# EAGLE board HIDaspx_mini2 (EAGLE 7.4.0)
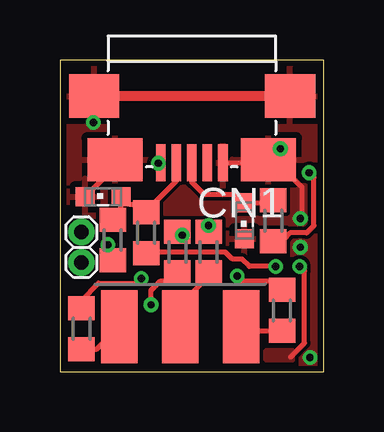
[diagram p0: board, top side]
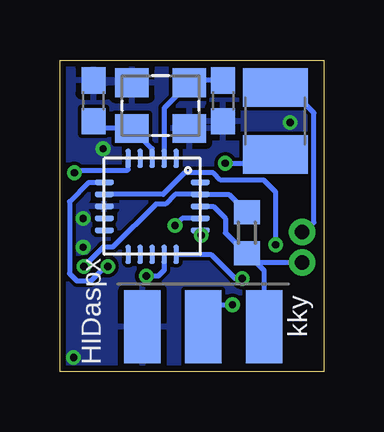
[diagram p1: board, bottom side, seen from below]

Size 11 x 12.99 mm. Coordinates in mm from the lower left corner, seen from the top.
Outline: 0,12.99 0,0 11,0 11,12.99 0,12.99
Copper layers (1*16): Top 0.035mm / dielectric 1.5mm / Bottom 0.035mm
Design rules "Elecrow_2-layer_eagle_rule": minimum track width 6mil, minimum drill 12mil, track to track 6mil, track to pad 6mil, pad to pad 6mil, via to via 6mil, smd to smd 0mil, copper to edge 10mil, drill to drill 10mil, minimum pad ring 10mil, minimum via ring 6mil, stop-mask expansion 2mil, vias tented up to drill 100mil, thermal gap 10mil

## Footprints (pad centres in the part's own frame; a part is rotated, then mirrored left to right if it is on the bottom)
C0603 = smd 1.1 x 1: 1 -0.85,0; 2 0.85,0
MICRO-B = smd 0.4 x 1.55: 1 1.3,2.775; 2 0.65,2.775; 3 0,2.775; 4 -0.65,2.775; 5 -1.3,2.775 | smd 2.3 x 1.8: CASE@1 -3.2,2.65; CASE@2 3.2,2.65 | smd 2.1 x 1.8: CASE@3 -4.1,0; CASE@4 4.075,0
1X02/HALF = drill 0.6 pad 1.016: 1 -0.635,0; 2 0.635,0
SML0603 = smd 0.8 x 0.8: A 0.75,0; C -0.75,0
C3225 = smd 1.6 x 2.7: 1 -1.4,0; 2 1.4,0
R0603 = smd 1 x 1.1: 1 -0.85,0; 2 0.85,0
MLF20 = smd 0.8 x 0.23: P$1 -2,1; P$2 -2,0.5; P$3 -2,0; P$4 -2,-0.5; P$5 -2,-1; P$11 2,-1; P$12 2,-0.5; P$13 2,0; P$14 2,0.5; P$15 2,1 | smd 0.23 x 0.8: P$6 -1,-2; P$7 -0.5,-2; P$8 0,-2; P$9 0.5,-2; P$10 1,-2; P$16 1,2; P$17 0.5,2; P$18 0,2; P$19 -0.5,2; P$20 -1,2
6PAD_ISP = smd 1.524 x 3.048 bottom: GND 2.54,0; MOSI 0,0; VCC -2.54,0 | smd 1.524 x 3.048: MISO -2.54,0; RST 2.54,0; SCK 0,0
V66RA = smd 1.4 x 1.2: P1X1 -1.2,-0.95; P2GND 1.2,-0.95; P3X2 1.2,0.95; P4GND -1.2,0.95

## Placement (x,y rotation side)
C4  22p  [C0603]  9.6,11.29 90 bottom
C5  22p  [C0603]  4.2,11.29 270 bottom
CN1  ZX62R-B-5P  [MICRO-B]  5.5,11.49 180 top
JP1  [1X02/HALF]  0.9,5.19 90 top
LED1  BLUE  [SML0603]  7.7,6.29 90 top
LED2  BLUE  [SML0603]  1.8,7.29 0 top
PSW  100m  [C3225]  2.02,10.45 270 bottom
R2  2.2k  [R0603]  2.2,5.49 90 top
R3  75  [R0603]  3.6,5.79 90 top
R4  75  [R0603]  8.9,6.29 90 top
R5  10k  [R0603]  3.2,5.79 90 bottom
R6  100  [R0603]  4.9,4.99 90 top
R7  100  [R0603]  0.9,1.79 270 top
R8  100  [R0603]  6.2,4.99 270 top
R9  100  [R0603]  9.26,2.55 270 top
U$1  TINY2313-*M*  [MLF20]  7.15,6.89 270 bottom
U$2  AVR-ISP-6-EDGE  [6PAD_ISP]  5.02,1.88 0 top
X1  FA238V  [V66RA]  6.8,11.09 180 bottom

## Library data of the parts
C4 C5 PSW R2-R9 = rcl
CN1 = con-USB
JP1 = pinhead'
LED1 LED2 = led
U$1 U$2 = avr-7
X1 = crystal_epson

## Nets
GND: C4.2 C5.2 CN1.5 CN1.CASE@1 CN1.CASE@2 CN1.CASE@3 CN1.CASE@4 LED1.C LED2.C U$1.P$8 U$2.GND X1.P2GND X1.P4GND
MISO: R7.1 U$1.P$15
MOSI: R6.2 U$1.P$16
N$1: C5.1 U$1.P$2 X1.P1X1
N$2: JP1.2 PSW.1
N$4: C4.1 U$1.P$3 X1.P3X2
N$5: CN1.1 PSW.2
N$6: CN1.2 LED2.A R2.2 R3.2
N$7: CN1.3 LED1.A R4.2
N$8: R2.1 U$1.P$7
N$9: R3.1 U$1.P$6
N$10: R4.1 U$1.P$5
N$11: R5.2 U$1.P$19
N$14: R8.2 U$2.SCK
N$15: R7.2 U$2.MISO
N$16: R9.2 U$2.RST
N$17: R6.1 U$2.MOSI
RST: R9.1 U$1.P$14
SCK: R8.1 U$1.P$17
VCC: JP1.1 R5.1 U$1.P$18 U$2.VCC

## Tracks (layer width: path | path; a pad name or v marks a point on that pad's centre or on a via)
GND  (via drill 0.3)
  Top 0.2: CN1.5 8.57,8.71 | 8.57,8.71 CN1.CASE@1 9.15,9.29 v9.2,9.29 | CN1.CASE@2 2.3,8.54 LED2.C | 8.57,8.71 9.07,8.71 10.1,7.69 10.1,6.49 v10.03,6.39
  Top 0.406: CN1.CASE@3 CN1.CASE@4
  Bottom 0.2: U$2.GND 7.56,1.83 7.5,1.89
  other vias: 1.4,10.39 10.03,5.19 10.43,0.59
  pour Bottom: 0,12.99 11,12.99 11,-0.01 0,-0.01
  pour Top (rank 6): 0,12.99 11,12.99 11,-0.01 0,-0.01
MISO  (via drill 0.3)
  Top 0.2: 0.9,2.69 R7.1 0.9,2.99 1.6,3.69 3.2,3.69 v3.4,3.89
  Bottom 0.2: U$1.P$15 4.7,4.89 3.7,3.89 v3.4,3.89
MOSI  (via drill 0.3)
  Top 0.2: v5.1,5.69 4.9,5.69 R6.2
  Bottom 0.2: U$1.P$16 5.2,5.84 v5.1,5.69
N$1
  Bottom 0.2: C5.1 5.5,12.14 X1.P1X1 6.65,10.98 U$1.P$2
N$2
  Bottom 0.2: PSW.1 1.76,11.59 1.2,11.59 0.4,10.79 0.4,6.22 0.8,5.82 JP1.2
N$4
  Bottom 0.2: U$1.P$3 7.15,9.29 X1.P3X2 9.3,10.14 C4.1
N$5  (via drill 0.3)
  Top 0.2: CN1.1 4.12,8.71 v4.1,8.69
  Bottom 0.2: 2.44,9.05 PSW.2 2.54,9.05 2.9,8.69 v4.1,8.69
N$6
  Top 0.2: 3.4,6.24 R3.2 | R2.2 2.55,6.79 LED2.A 2.75,7.09 2.8,7.09 2.9,6.99 3.1,6.99 3.45,6.64 R3.2 | CN1.2 4.85,7.94 3.55,6.64 R3.2
N$7
  Top 0.2: CN1.3 5.5,7.89 6,7.39 7.3,7.39 7.55,7.14 LED1.A 8.9,7.04 R4.2 8.95,7.04
N$8  (via drill 0.3)
  Top 0.2: v2,5.29 2,4.94 R2.1
  Bottom 0.2: v2,5.29 2,7.49 2.5,7.99 4.3,7.99 4.6,8.29 5.8,8.29 6.7,7.39 U$1.P$7
N$9  (via drill 0.3)
  Top 0.2: 3.95,4.69 R3.1 3.75,4.64 4.1,4.99 6.9,4.99 7.2,4.69 7.6,4.69 7.9,4.39 v9,4.39
  Bottom 0.2: U$1.P$6 9.8,7.89 10.6,7.09 10.6,4.09 10.3,3.79 9.7,3.79 9.1,4.39 v9,4.39
N$10  (via drill 0.3)
  Top 0.2: v10.4,8.29 10.6,8.09 10.6,6.09 10.3,5.79 9.6,5.79 9.3,5.49 R4.1
  Bottom 0.2: U$1.P$5 8.15,8.43 8.2,8.39 10.3,8.39 v10.4,8.29
N$11  (via drill 0.3)
  Top 0.2: 9.63,0.61 10.2,1.19 10.2,4.19 v10,4.39
  Bottom 0.2: v10,4.39 9.2,5.19 8.8,5.19 7,6.99 6.6,6.99 6.2,7.39 U$1.P$19 3.95,7.39 R5.2
  pour Top: 8.6,0.49 8.6,0.89 9.7,0.89 9.7,0.49
N$14
  Top 0.2: 4.7,2.19 U$2.SCK 5,2.59 5.06,2.59 5.4,2.94 5.4,3.19 6.35,4.14 R8.2
N$15
  Top 0.2: R7.2 1.54,0.94 U$2.MISO
N$16
  Top 0.2: U$2.RST 7.73,1.7 R9.2
N$17  (via drill 0.3)
  Top 0.2: 4.6,4.14 R6.1 4.55,3.79 4.2,3.79 3.8,3.39 v3.8,2.79
  Bottom 0.2: U$2.MOSI 5.02,2.79 v3.8,2.79
RST  (via drill 0.3)
  Top 0.2: v7.4,3.99 7.6,3.79 8.8,3.79 9,3.59 9.28,3.59 R9.1
  Bottom 0.2: U$1.P$14 6.65,4.23 6.9,3.99 v7.4,3.99
SCK  (via drill 0.3)
  Top 0.2: v6.2,6.09 R8.1 6.2,5.74
  Bottom 0.2: U$1.P$17 5.9,6.39 v6.2,6.09
VCC
  Bottom 0.2: U$1.P$18 4.6,6.89 4.1,6.39 4.1,5.79 3.6,5.29 3.55,5.29 R5.1 2.81,4.55 | 2.81,4.55 JP1.1 | U$2.VCC 2.48,4.22 2.81,4.55

## Text on the board
bPlace: kky | HIDaspx